# EAGLE board esp-module-ou (EAGLE 9.6.2)
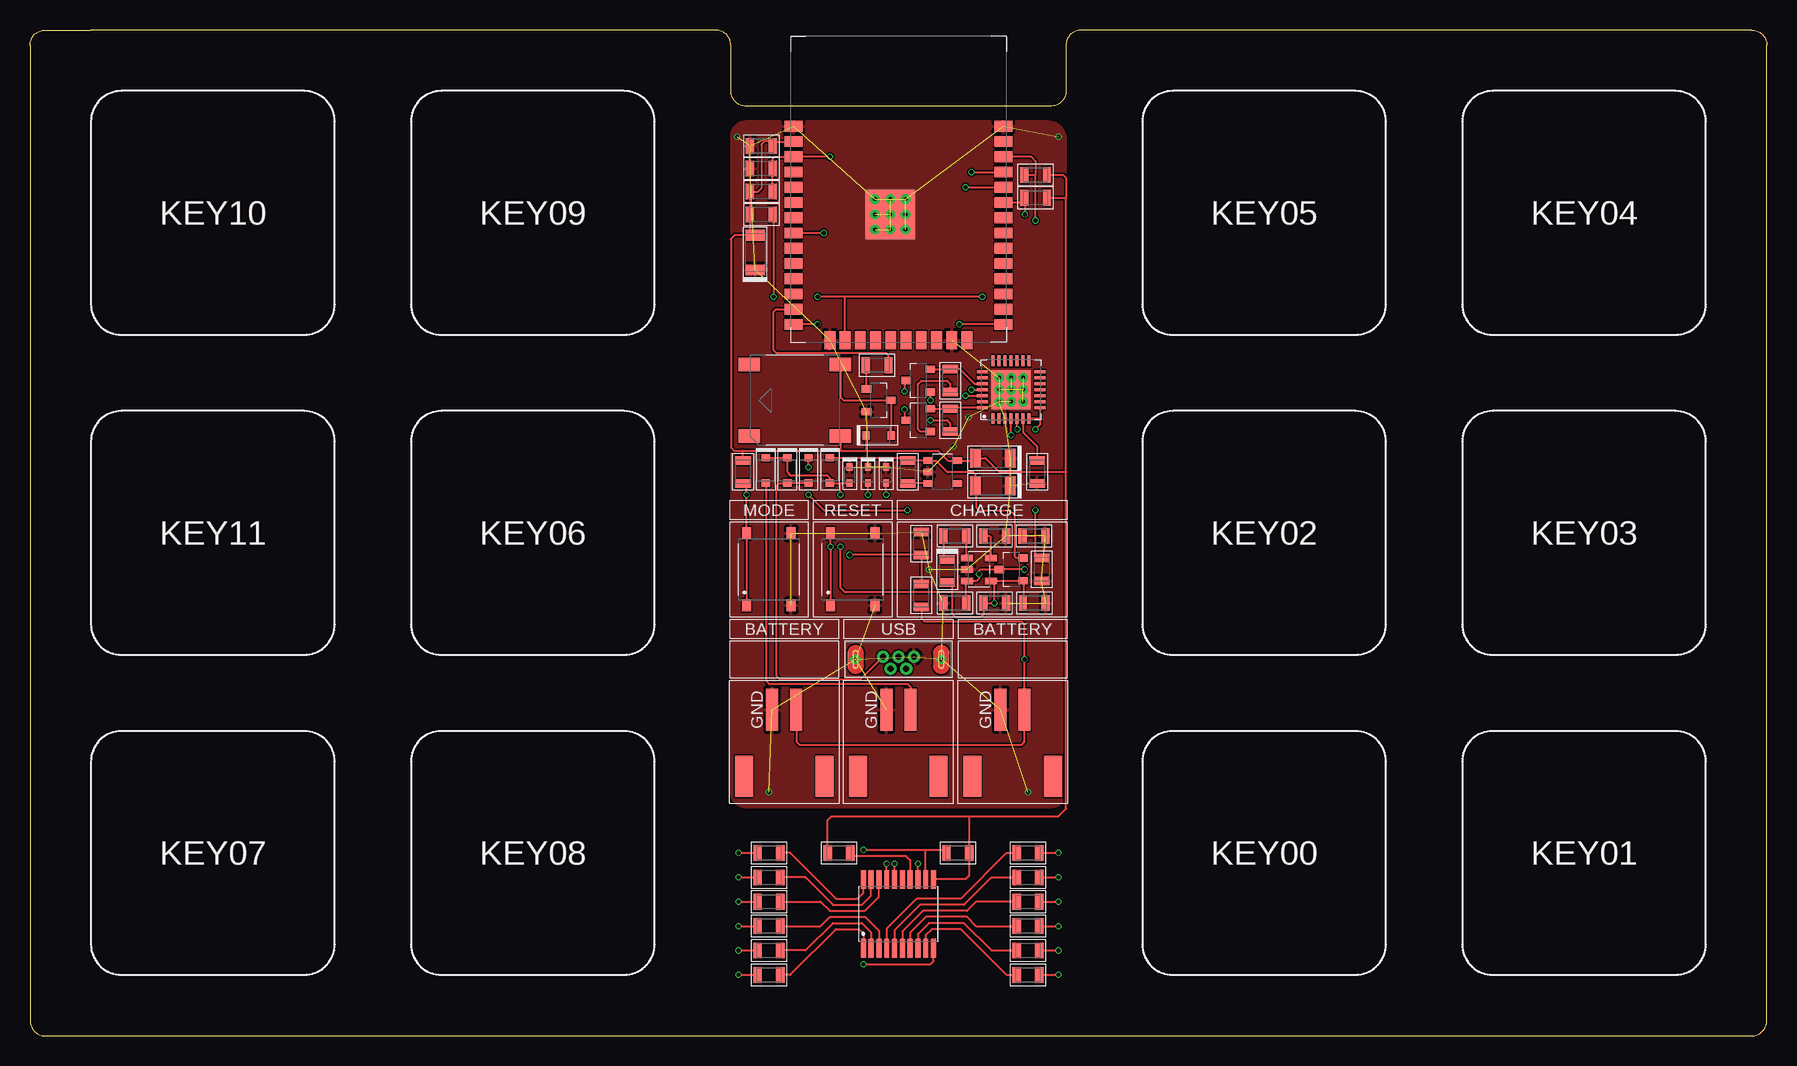
[diagram p0: board, top side]
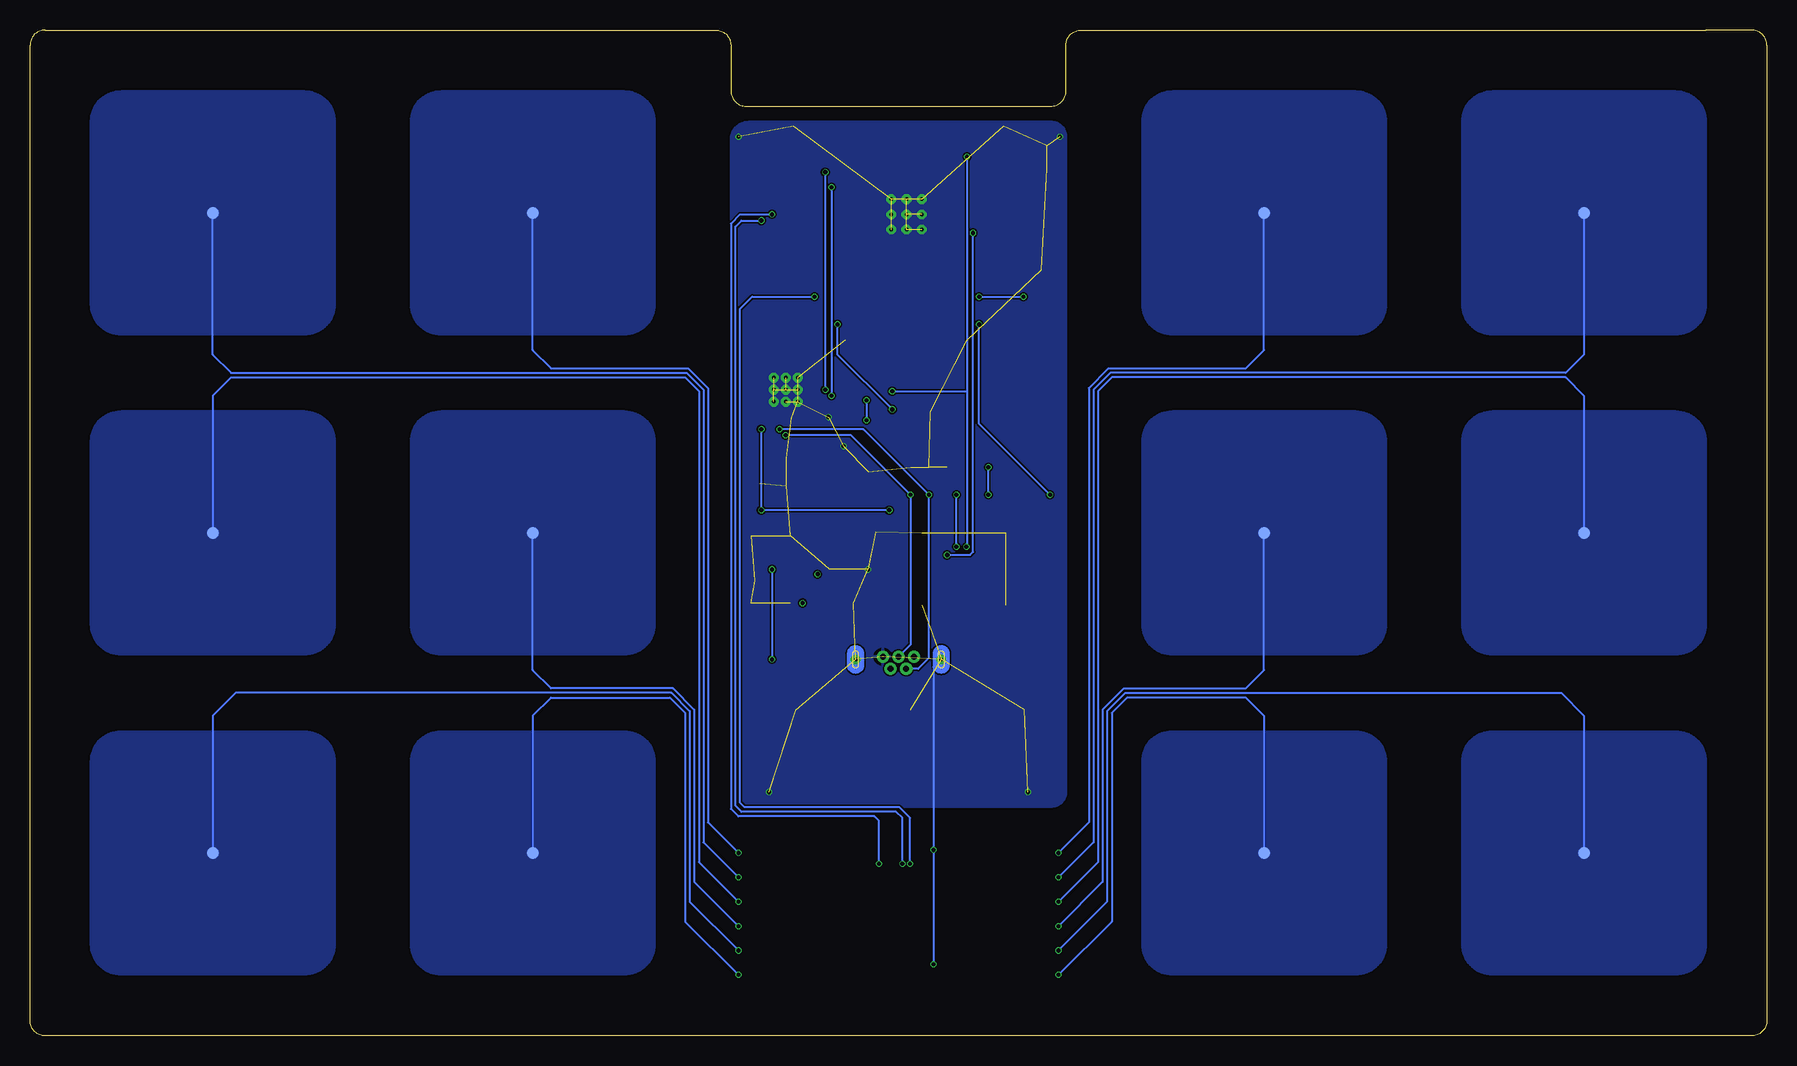
[diagram p1: board, bottom side, seen from below]

Size 144.78 x 83.82 mm. Coordinates in mm from the lower left corner, seen from the top.
Outline: 0,82.55 0,1.27 arc90 1.27,0 143.51,0 arc90 144.78,1.27 144.78,82.55 arc90 143.51,83.82 87.63,83.82 arc90 86.36,82.55 86.36,78.74 arc-90 85.09,77.47 59.69,77.47 arc-90 58.42,78.74 58.42,82.55 arc90 57.15,83.82 5.08,83.82 5.08,83.82 1.27,83.82 arc90 0,82.55
Copper layers (1*16): Top 0.035mm / dielectric 1.6mm / Bottom 0.035mm
Design rules "jlcpcb-2layers": minimum track width 5mil, minimum drill 0.3mm, track to track 5mil, track to pad 5mil, pad to pad 5mil, via to via 5mil, smd to smd 5mil, copper to edge 0.2mm, drill to drill 6mil, minimum pad ring 10mil, minimum via ring 3mil, stop-mask expansion 4mil, vias tented up to drill 0mil, thermal gap 10mil

## Footprints (pad centres in the part's own frame; a part is rotated, then mirrored left to right if it is on the bottom)
I1206-M3216-D = smd 0.9 x 1.6: 1 -1.45,0; 2 1.45,0
I0805-M2012-C = smd 0.7 x 1.3: 1 -0.95,0; 2 0.95,0
SOD-323 = smd 0.6 x 0.7: 1 -1.055,0; 2 1.055,0
SOD-523 = smd 0.6 x 0.5: 1 -0.66,0; 2 0.66,0
USB-A-MICRO-TOP = drill 0.5 pad 0.9: 1 -1.3,0.22; 2 -0.65,-0.78; 3 0,0.22; 4 0.65,-0.78; 5 1.3,0.22 | drill 0.3 pad 0.36: 6 3.57,0; 7 -3.57,0
JST-S2B-PH-SM4-TB = smd 1 x 3.5: 1 -1,0; 2 1,0 | smd 1.5 x 3.4: A -3.35,5.55; B 3.35,5.55
I0805-M2012-D = smd 0.7 x 1.3: 1 -0.95,0; 2 0.95,0
QTOUCH = smd 1 x 1: 1 0,0
SOT-23-3 = smd 0.8 x 0.6: 1 1.01,-0.95; 2 1.01,0.95; 3 -1.01,0
I0805-M2012-R = smd 0.7 x 1.3: 1 -0.95,0; 2 0.95,0
SMD-SW-4 = smd 1 x 0.75: 1 -3,1.85; 2 3,1.85; 3 -3,-1.85; 4 3,-1.85
SOT-25-5 = smd 0.55 x 0.8: 1 0.95,1.2; 2 0,1.2; 3 -0.95,1.2; 4 -0.95,-1.2; 5 0.95,-1.2
QFN-28 = smd 0.9 x 0.25: 1 -2.4,1.5; 2 -2.4,1; 3 -2.4,0.5; 4 -2.4,0; 5 -2.4,-0.5; 6 -2.4,-1; 7 -2.4,-1.5; 15 2.4,-1.5; 16 2.4,-1; 17 2.4,-0.5; 18 2.4,0; 19 2.4,0.5; 20 2.4,1; 21 2.4,1.5 | smd 0.25 x 0.9: 8 -1.5,-2.4; 9 -1,-2.4; 10 -0.5,-2.4; 11 0,-2.4; 12 0.5,-2.4; 13 1,-2.4; 14 1.5,-2.4; 22 1.5,2.4; 23 1,2.4; 24 0.5,2.4; 25 0,2.4; 26 -0.5,2.4; 27 -1,2.4; 28 -1.5,2.4 | smd 3.25 x 3.25: 29 0,0 | drill 0.3 pad 0.5: 30 -1,1; 31 0,1; 32 1,1; 33 -1,0; 34 0,0; 35 1,0; 36 -1,-1; 37 0,-1; 38 1,-1
SOT-23-5 = smd 1 x 0.55: 1 -1,0.95; 2 -1,0; 3 -1,-0.95; 4 1,-0.95; 5 1,0.95
TSSOP-20 = smd 1.572 x 0.407: 1 -2.872,2.925; 2 -2.872,2.275; 3 -2.872,1.625; 4 -2.872,0.975; 5 -2.872,0.325; 6 -2.872,-0.325; 7 -2.872,-0.975; 8 -2.872,-1.625; 9 -2.872,-2.275; 10 -2.872,-2.925; 11 2.872,-2.925; 12 2.872,-2.275; 13 2.872,-1.625; 14 2.872,-0.975; 15 2.872,-0.325; 16 2.872,0.325; 17 2.872,0.975; 18 2.872,1.625; 19 2.872,2.275; 20 2.872,2.925
SMD-BUZZER = smd 1.78 x 1.15: 1 -3.795,2.98; 2 -3.795,-2.98; 3 3.795,-2.98; 4 3.795,2.98
ESP32-WROOM-32 = smd 1.5 x 0.9: 1 -8.75,7.34; 2 -8.75,6.07; 3 -8.75,4.8; 4 -8.75,3.53; 5 -8.75,2.26; 6 -8.75,0.99; 7 -8.75,-0.28; 8 -8.75,-1.55; 9 -8.75,-2.82; 10 -8.75,-4.09; 11 -8.75,-5.36; 12 -8.75,-6.63; 13 -8.75,-7.9; 14 -8.75,-9.17; 25 8.75,-9.17; 26 8.75,-7.9; 27 8.75,-6.63; 28 8.75,-5.36; 29 8.75,-4.09; 30 8.75,-2.82; 31 8.75,-1.55; 32 8.75,-0.28; 33 8.75,0.99; 34 8.75,2.26; 35 8.75,3.53; 36 8.75,4.8; 37 8.75,6.07; 38 8.75,7.34 | smd 0.9 x 1.5: 15 -5.715,-10.47; 16 -4.445,-10.47; 17 -3.175,-10.47; 18 -1.905,-10.47; 19 -0.635,-10.47; 20 0.635,-10.47; 21 1.905,-10.47; 22 3.175,-10.47; 23 4.445,-10.47; 24 5.715,-10.47 | smd 4.1 x 4.1: 39 -0.68,0 | drill 0.3 pad 0.5: 40 0.59,-1.27; 41 -0.68,-1.27; 42 -1.95,-1.27; 43 0.59,0; 44 -0.68,0; 45 -1.95,0; 46 0.59,1.27; 47 -0.68,1.27; 48 -1.95,1.27

## Placement (x,y rotation side)
C1  10uF  [I1206-M3216-D]  80.26,45.85 0 top
C2  10uF  [I1206-M3216-D]  80.26,48.13 0 top
C3  1U  [I0805-M2012-C]  84.33,38.86 90 top
C4  10U  [I0805-M2012-C]  80.42,36.07 0 top
C5  100nF  [I0805-M2012-C]  83.69,41.66 180 top
C6  100nF  [I0805-M2012-C]  83.95,46.99 90 top
C7  10U  [I0805-M2012-C]  77.09,36.07 180 top
C8  100nF  [I0805-M2012-C]  77.34,15.25 180 top
C9  22uF  [I1206-M3216-D]  60.45,65.28 270 top
C10  100nF  [I0805-M2012-C]  60.96,74.17 180 top
C11  100nF  [I0805-M2012-C]  60.96,72.26 180 top
D1  30V  [SOD-323]  64.9,47.12 90 top
D2  5.0V  [SOD-523]  68.33,46.74 90 top
D3  30V  [SOD-323]  61.34,47.12 90 top
D4  30V  [SOD-323]  63.12,47.12 90 top
D5  5.0V  [SOD-523]  71.37,46.74 90 top
D6  30V  [SOD-323]  66.67,47.12 90 top
D7  5.0V  [SOD-523]  69.85,46.74 90 top
D8  30V  [SOD-323]  70.74,50.04 180 top
J1  USB-A-MICRO-TOP  [USB-A-MICRO-TOP]  72.39,31.37 0 top
J2  2P  [JST-S2B-PH-SM4-TB]  62.87,27.18 180 top
J3  2P  [JST-S2B-PH-SM4-TB]  81.92,27.18 180 top
J4  2P  [JST-S2B-PH-SM4-TB]  72.39,27.18 180 top
LED1  RED  [I0805-M2012-D]  76.45,38.73 90 top
P1  2P  [CONNECTOR-DEFAULT]  62.99,21.59 0 top
P2  2P  [CONNECTOR-DEFAULT]  81.92,21.59 0 top
P3  2P  [CONNECTOR-DEFAULT]  72.39,21.59 180 top
PAD1  QTOUCH  [QTOUCH]  102.87,15.24 180 bottom
PAD2  QTOUCH  [QTOUCH]  129.54,15.24 180 bottom
PAD3  QTOUCH  [QTOUCH]  102.87,41.91 180 bottom
PAD4  QTOUCH  [QTOUCH]  129.54,41.91 180 bottom
PAD5  QTOUCH  [QTOUCH]  129.54,68.58 180 bottom
PAD6  QTOUCH  [QTOUCH]  102.87,68.58 180 bottom
PAD7  QTOUCH  [QTOUCH]  41.91,41.91 180 bottom
PAD8  QTOUCH  [QTOUCH]  15.24,15.24 180 bottom
PAD9  QTOUCH  [QTOUCH]  41.91,15.24 180 bottom
PAD10  QTOUCH  [QTOUCH]  41.91,68.58 180 bottom
PAD11  QTOUCH  [QTOUCH]  15.24,68.58 180 bottom
PAD12  QTOUCH  [QTOUCH]  15.24,41.91 180 bottom
Q1  DMG3415U  [SOT-23-3]  81.79,38.86 0 top
R1  100k  [I0805-M2012-R]  73.15,46.99 270 top
R2  100k  [I0805-M2012-R]  83.72,36.07 0 top
R3  220  [I0805-M2012-R]  77.09,41.66 0 top
R4  2k  [I0805-M2012-R]  80.42,41.66 0 top
R5  10k  [I0805-M2012-R]  76.71,51.31 270 top
R6  10k  [I0805-M2012-R]  76.71,54.61 270 top
R7  100k  [I0805-M2012-R]  74.3,36.7 90 top
R8  100k  [I0805-M2012-R]  74.3,41.02 90 top
R9  4.7k  [I0805-M2012-R]  83.82,71.75 180 top
R10  4.7k  [I0805-M2012-R]  83.82,69.84 180 top
R11  10k  [I0805-M2012-R]  83.19,5.08 0 top
R12  10k  [I0805-M2012-R]  83.19,7.11 0 top
R13  10k  [I0805-M2012-R]  83.19,9.14 0 top
R14  10k  [I0805-M2012-R]  83.19,11.18 0 top
R15  10k  [I0805-M2012-R]  83.19,13.21 0 top
R16  10k  [I0805-M2012-R]  83.19,15.24 0 top
R17  47k  [I0805-M2012-R]  60.96,68.46 0 top
R18  47k  [I0805-M2012-R]  67.44,15.23 0 top
R19  10k  [I0805-M2012-R]  61.59,9.14 0 top
R20  10k  [I0805-M2012-R]  61.59,7.11 0 top
R21  10k  [I0805-M2012-R]  61.59,5.08 180 top
R22  10k  [I0805-M2012-R]  61.59,15.24 180 top
R23  10k  [I0805-M2012-R]  61.59,13.21 180 top
R24  10k  [I0805-M2012-R]  61.59,11.18 0 top
R25  220  [I0805-M2012-R]  70.61,55.88 180 top
R26  100k  [I0805-M2012-R]  60.96,70.36 0 top
R27  100k  [I0805-M2012-R]  59.44,46.99 270 top
S1  SPST  [SMD-SW-4]  68.58,38.86 90 top
S2  SPST  [SMD-SW-4]  61.59,38.86 90 top
T1  BC817  [SOT-23-3]  74.04,54.61 0 top
T2  BC817  [SOT-23-3]  74.04,51.31 0 top
T3  BC817  [SOT-23-3]  70.74,52.96 180 top
U1  AP2112  [SOT-25-5]  76.07,46.99 90 top
U2  CP2102  [QFN-28]  81.79,53.85 90 top
U3  MCP73831  [SOT-23-5]  79.12,38.86 0 top
U4  AT42QT2120  [TSSOP-20]  72.39,10.16 90 top
U5  BUZZER  [SMD-BUZZER]  63.75,52.96 180 top
U6  ESP32-WROOM-N8-32  [ESP32-WROOM-32]  72.39,68.45 0 top

## Library data of the parts
C1 C2 = deiring-components; LCSC: C7171; MF: Kyocera AVX; MPN: TAJA106K016RNJ; VOLTAGE: 16V
C3 = deiring-components; LCSC: C215803; MF: FH (Guangdong Fenghua Advanced Tech); MPN: 0805B105K500NT; TOLERANCE: 10%; VOLTAGE: 50V
C4 C7 = deiring-components; LCSC: C15850; MF: Samsung Electro-Mechanics; MPN: CL21A106KAYNNNE; TOLERANCE: 10%; VOLTAGE: 25V
C5 C6 C8 C10 C11 = deiring-components; LCSC: C38141; MF: FH (Guangdong Fenghua Advanced Tech); MPN: 0805B104K500NT; TOLERANCE: 10%; VOLTAGE: 50V
C9 = deiring-components; LCSC: C11366; MF: Kyocera AVX; MPN: TAJA226K010RNJ; VOLTAGE: 10V
D1 D3 D4 D6 D8 = deiring-components; LCSC: C124187; MF: Diodes Incorporated; MPN: BAT760-7
D2 D5 D7 = deiring-components; LCSC: C383211; MF: LRC; MPN: LESD5D5.0CT1G
J1 = deiring-components; LCSC: C437032; MF: XKB Connectivity; MPN: U255-051N-4BH70-FS
J2-J4 = deiring-components; LCSC: C295747; MF: JST Sales America; MPN: S2B-PH-SM4-TB(LF)(SN)
LED1 = deiring-components; LCSC: C84256; MF: Foshan NationStar Optoelectronics; MPN: FC-2012HRK-620D
P1-P3 = deiring-components; LCSC: C3195190; MF: JST Sales America; MPN: PHR-2
PAD1-PAD12 = deiring-components
Q1 = deiring-components; CURRENT: 4A; LCSC: C96616; MF: Diodes Incorporated; MPN: DMG3415U-7; VOLTAGE: 20V
R1 R2 R7 R8 R26 R27 = deiring-components; LCSC: C149504; MF: UNI-ROYAL(Uniroyal Elec); MPN: 0805W8F1003T5E; WATTAGE: 1/8W
R3 R25 = deiring-components; LCSC: C17557; MF: UNI-ROYAL(Uniroyal Elec); MPN: 0805W8F2200T5E; WATTAGE: 1/8W
R4 = deiring-components; LCSC: C17604; MF: UNI-ROYAL(Uniroyal Elec); MPN: 0805W8F2001T5E; WATTAGE: 1/8W
R5 R6 R11-R16 R19-R24 = deiring-components; LCSC: C17414; MF: UNI-ROYAL(Uniroyal Elec); MPN: 0805W8F1002T5E; WATTAGE: 1/8W
R9 R10 = deiring-components; LCSC: C17673; MF: UNI-ROYAL(Uniroyal Elec); MPN: 0805W8F4701T5E; WATTAGE: 1/8W
R17 R18 = deiring-components; LCSC: C17713; MF: UNI-ROYAL(Uniroyal Elec); MPN: 0805W8F4702T5E; WATTAGE: 1/8W
S1 S2 = deiring-components; LCSC: C318884; MF: XKB Enterprise; MPN: TS-1187A-B-A-B; VOLTAGE: 12V
T1-T3 = deiring-components; LCSC: C52801; MF: Nexperia; MPN: BC817-40,215
U1 = deiring-components; LCSC: C3021085; MF: TECH PUBLIC; MPN: TPAP2112K-3.3TRG1
U2 = deiring-components; LCSC: C6568; MF: SILICON LABS; MPN: CP2102-GMR
U3 = deiring-components; LCSC: C14879; MF: Microchip Tech; MPN: MCP73831T-2ATI/OT
U4 = deiring-components; LCSC: C1522278; MF: Microchip Tech; MPN: AT42QT2120-XU
U5 = deiring-components; LCSC: C95299; MF: MLT-7525; MPN: Jiangsu Huaneng Elec
U6 = deiring-components; LCSC: C529582; MF: Espressif Systems; MPN: ESP32-WROOM-32-N8; VALUES: ESP32

## Nets
!CHANGE: R17.2 U4.17 U6.16
!RESET: R18.2 U4.14
APEN: R1.2 U1.3
BAT: R7.2 R8.1 U6.8
BUZ: R25.1 U6.13
BZB: R25.2 T3.1
BZC: D8.1 T3.3 U5.2
D+: D5.1 J1.3 U2.4
D-: D7.1 J1.2 U2.5
DTR: R5.1 T2.2 U2.28
DTRT: R5.2 T1.1
EN: C11.1 R26.2 S1.1 S1.2 T1.3 U6.3
GND: C1.2 C2.2 C3.1 C4.2 C5.1 C6.1 C7.2 C8.2 C9.2 C10.2 C11.2 D2.2 D5.2 D7.2 J1.5 J1.6 J1.7 J2.2 J3.2 J4.2 R2.2 R4.2 R8.2 S1.3 S1.4 S2.3 S2.4 T3.2 U1.2 U2.3 U2.29 U2.30 U2.31 U2.32 U2.33 U2.34 U2.35 U2.36 U2.37 U2.38 U3.2 U4.10 U4.12 U6.1 U6.15 U6.23 U6.38 U6.39 U6.40 U6.41 U6.42 U6.43 U6.44 U6.45 U6.46 U6.47 U6.48
IO00: T2.3 U6.25
KEY0: R11.1 U4.9
KEY1: R12.1 U4.8
KEY2: R13.1 U4.7
KEY3: R14.1 U4.6
KEY4: R15.1 U4.5
KEY5: R16.1 U4.4
KEY6: R19.2 U4.3
KEY7: R20.2 U4.2
KEY8: R21.1 U4.1
KEY9: R22.1 U4.20
KEY10: R23.1 U4.19
KEY11: R24.2 U4.18
MODE: R27.2 S2.1 S2.2 U6.14
PAD00: PAD1.1 R11.2
PAD01: PAD2.1 R12.2
PAD02: PAD3.1 R13.2
PAD03: PAD4.1 R14.2
PAD04: PAD5.1 R15.2
PAD05: PAD6.1 R16.2
PAD06: PAD7.1 R19.1
PAD07: PAD8.1 R20.1
PAD08: PAD9.1 R21.2
PAD09: PAD10.1 R22.2
PAD10: PAD11.1 R23.2
PAD11: PAD12.1 R24.1
PROG: R4.1 U3.5
RTS: R6.1 T1.2 U2.24
RTST: R6.2 T2.1
RXD0: U2.26 U6.34
SCL: R9.2 U4.16 U6.36
SDA: R10.2 U4.13 U6.33
STAT: R3.2 U3.1
STATLED: LED1.2 R3.1
TXD0: U2.25 U6.35
VBAT: C7.1 J2.1 J3.1 Q1.3 R7.1 U3.3
VBUS: C3.2 C5.2 D1.2 U2.7 U2.8
VCC3: C2.1 C8.1 C9.1 C10.1 D8.2 R9.1 R10.1 R17.1 R18.1 R26.1 R27.1 U1.5 U4.11 U5.1 U6.2
VCC5: C4.1 D2.1 D3.2 D4.2 D6.1 LED1.1 Q1.1 R2.1 U3.4
VDD: C6.2 U2.6
VEXT: D3.1 J4.1
VIN: C1.1 D6.2 Q1.2 R1.1 U1.1
VUSB: D1.1 D4.1 J1.1

## Tracks (layer width: path | path; a pad name or v marks a point on that pad's centre or on a via)
!CHANGE  (via drill 0.35)
  Top 0.152: U4.17 v71.42,14.35 | v79.38,61.59 67.94,61.59 | 67.94,61.59 v65.66,61.59 | R17.2 61.98,68.46 v61.98,61.59 | U6.16 67.94,61.59
  Bottom 0.152: v71.42,14.35 71.42,18.16 72.3,19.05 85.22,19.05 85.6,19.43 85.6,60.58 84.58,61.59 v79.38,61.59 | v65.66,61.59 v61.98,61.59
!RESET
  Top 0.152: R18.2 68.39,14.98 73.03,14.98 73.36,14.65 U4.14
APEN
  Top 0.152: U1.3 R1.2
BAT  (via drill 0.35)
  Top 0.152: R7.2 R8.1 v68.33,40.07 | v66.17,66.9 U6.8
  Bottom 0.152: v68.33,40.07 66.42,40.07 66.17,40.33 v66.17,66.9
BUZ
  Top 0.152: 71.56,56.01 R25.1 71.56,56.71 71.37,56.9 62.23,56.9 61.98,57.15 61.98,60.33 62.2,60.55 U6.13
BZB
  Top 0.152: T3.1 69.73,55.88 R25.2
BZC
  Top 0.152: U5.2 67.55,53.23 67.82,52.96 T3.3 71.79,52.96 D8.1
D+  (via drill 0.35)
  Top 0.152: v71.37,45.09 D5.1 | v81.79,50.04 U2.4
  Bottom 0.152: v81.79,50.04 76.33,50.04 v71.37,45.09 71.37,32.6 J1.3
D-  (via drill 0.35)
  Top 0.152: v69.85,45.09 D7.1 | v82.3,50.55 82.29,50.55 U2.5
  Bottom 0.152: v82.3,50.55 75.31,50.55 v69.85,45.09 69.85,31.5 70.76,30.59 J1.2
DTR
  Top 0.152: T2.2 R5.1 76.8,52.35 U2.28
DTRT  (via drill 0.35)
  Top 0.152: v75.06,52.96 T1.1 | v75.06,51.31 76.45,51.31 76.71,51.05 R5.2
  Bottom 0.152: v75.06,52.96 v75.06,51.31
EN  (via drill 0.35)
  Top 0.152: T1.3 72.9,54.61 v72.9,53.72 | R26.2 C11.1 61.91,73.09 62.08,73.25 U6.3 v66.67,73.25 | S1.2 v66.73,40.77 S1.1
  Bottom 0.152: v66.67,73.25 66.67,53.72 | 66.67,53.72 66.67,40.82 v66.73,40.77 | v72.9,53.72 66.67,53.72
GND  (via drill 0.35)  (58 unrouted)
  Top 0.152: U4.10 75.31,6.23 75.06,5.97 v69.47,5.97 | v69.47,15.49 74.67,15.49 | U4.12 74.67,15.49 | 74.67,15.49 76.39,15.49 C8.2
  Bottom 0.152: v69.47,5.97 v69.47,15.49 69.47,30.72 J1.7
  other vias: 74.93,38.86 78.23,51.56 58.93,74.93 85.72,74.93 61.59,20.32 83.19,20.32 76.96,49.15
  pour Top: 59.69,19.05 85.09,19.05 arc90 86.36,20.32 86.36,74.68 arc90 84.84,76.2 59.69,76.2 arc90 58.42,74.93 58.42,20.32 arc90
  pour Bottom: 59.69,19.05 85.09,19.05 arc90 86.36,20.32 86.36,74.68 arc90 84.84,76.2 59.69,76.2 arc90 58.42,74.93 58.42,20.32 arc90
IO00  (via drill 0.35)
  Top 0.152: T2.3 72.9,51.31 v72.9,52.2 | U6.25 v77.47,59.28
  Bottom 0.152: v72.9,52.2 77.47,56.76 v77.47,59.28
KEY0
  Top 0.152: R11.1 81.41,5.08 77.6,8.89 75.18,8.89 74.67,8.37 U4.9
KEY1
  Top 0.152: R12.1 80.14,7.11 77.85,9.4 74.93,9.4 74.02,8.48 U4.8
KEY2
  Top 0.152: R13.1 78.87,9.14 78.11,9.91 74.68,9.91 73.36,8.6 U4.7
KEY3
  Top 0.152: R14.1 78.87,11.18 78.11,10.41 74.42,10.41 72.72,8.71 U4.6
KEY4
  Top 0.152: R15.1 80.14,13.21 77.85,10.92 74.17,10.92 72.06,8.82 U4.5
KEY5
  Top 0.152: R16.1 81.41,15.24 77.6,11.43 73.91,11.43 71.42,8.93 U4.4
KEY6
  Top 0.152: U4.3 70.77,8.74 69.6,9.91 66.67,9.91 65.91,9.14 R19.2
KEY7
  Top 0.152: R20.2 64.64,7.11 66.93,9.4 69.34,9.4 70.11,8.62 U4.2
KEY8
  Top 0.152: R21.1 63.37,5.08 67.18,8.89 69.09,8.89 69.47,8.51 U4.1
KEY9
  Top 0.152: R22.1 63.37,15.24 67.18,11.43 68.96,11.43 69.47,11.93 U4.20
KEY10
  Top 0.152: R23.1 64.64,13.21 66.93,10.92 69.34,10.92 70.11,11.7 U4.19
KEY11
  Top 0.152: R24.2 65.91,11.18 66.67,10.41 69.6,10.41 70.77,11.58 U4.18
MODE  (via drill 0.35)
  Top 0.152: S2.1 S2.2 v59.74,45.09 59.74,46.04 R27.2 | v65.66,59.28 U6.14
  Bottom 0.152: v59.74,45.09 65.66,51 v65.66,59.28
PAD00  (via drill 0.35)
  Top 0.152: R11.2 v85.72,5.08
  Bottom 0.152: PAD1.1 102.87,26.67 101.35,28.19 91.44,28.19 90.17,26.92 90.17,9.53 v85.72,5.08
  pour Bottom: 92.71,22.86 92.71,7.62 arc90 95.25,5.08 110.49,5.08 arc90 113.03,7.62 113.03,22.86 arc90 110.49,25.4 95.25,25.4 arc90
PAD01  (via drill 0.35)
  Top 0.152: R12.2 v85.72,7.11
  Bottom 0.152: PAD2.1 129.54,26.67 127.64,28.57 91.31,28.57 89.79,27.05 89.79,11.18 v85.72,7.11
  pour Bottom: 139.7,7.62 139.7,22.86 arc90 137.16,25.4 121.92,25.4 arc90 119.38,22.86 119.38,7.62 arc90 121.92,5.08 137.16,5.08 arc90
PAD02  (via drill 0.35)
  Top 0.152: R13.2 v85.72,9.14
  Bottom 0.152: PAD3.1 102.87,30.48 101.35,28.96 91.19,28.96 89.41,27.18 89.41,12.83 v85.72,9.14
  pour Bottom: 110.49,52.07 95.25,52.07 arc90 92.71,49.53 92.71,34.29 arc90 95.25,31.75 110.49,31.75 arc90 113.03,34.29 113.03,49.53 arc90
PAD03  (via drill 0.35)
  Top 0.152: R14.2 v85.72,11.18
  Bottom 0.152: PAD4.1 129.54,53.34 128.02,54.86 90.17,54.86 89.03,53.72 89.03,14.48 v85.72,11.18
  pour Bottom: 137.16,52.07 121.92,52.07 arc90 119.38,49.53 119.38,34.29 arc90 121.92,31.75 137.16,31.75 arc90 139.7,34.29 139.7,49.53 arc90
PAD04  (via drill 0.35)
  Top 0.152: R15.2 v85.72,13.21
  Bottom 0.152: PAD5.1 129.54,56.77 128.02,55.24 90.04,55.24 88.65,53.85 88.65,16.13 v85.72,13.21
  pour Bottom: 137.16,78.74 121.92,78.74 arc90 119.38,76.2 119.38,60.96 arc90 121.92,58.42 137.16,58.42 arc90 139.7,60.96 139.7,76.2 arc90
PAD05  (via drill 0.35)
  Top 0.152: R16.2 v85.72,15.24
  Bottom 0.152: PAD6.1 102.87,57.15 101.35,55.63 89.92,55.63 88.27,53.98 88.27,17.78 v85.72,15.24
  pour Bottom: 110.49,78.74 95.25,78.74 arc90 92.71,76.2 92.71,60.96 arc90 95.25,58.42 110.49,58.42 arc90 113.03,60.96 113.03,76.2 arc90
PAD06  (via drill 0.35)
  Top 0.152: v59.05,9.14 R19.1
  Bottom 0.152: PAD7.1 41.91,30.48 43.43,28.96 53.59,28.96 55.37,27.18 55.37,12.83 v59.05,9.14
  pour Bottom: 31.75,49.53 31.75,34.29 arc90 34.29,31.75 49.53,31.75 arc90 52.07,34.29 52.07,49.53 arc90 49.53,52.07 34.29,52.07 arc90
PAD07  (via drill 0.35)
  Top 0.152: v59.05,7.11 R20.1
  Bottom 0.152: PAD8.1 15.24,26.67 17.14,28.57 53.47,28.57 54.99,27.05 54.99,11.18 v59.05,7.11
  pour Bottom: 22.86,25.4 7.62,25.4 arc90 5.08,22.86 5.08,7.62 arc90 7.62,5.08 22.86,5.08 arc90 25.4,7.62 25.4,22.86 arc90
PAD08  (via drill 0.35)
  Top 0.152: v59.05,5.08 R21.2
  Bottom 0.152: PAD9.1 41.91,26.67 43.43,28.19 53.34,28.19 54.61,26.92 54.61,9.53 v59.05,5.08
  pour Bottom: 52.07,7.62 52.07,22.86 arc90 49.53,25.4 34.29,25.4 arc90 31.75,22.86 31.75,7.62 arc90 34.29,5.08 49.53,5.08 arc90
PAD09  (via drill 0.35)
  Top 0.152: v59.05,15.24 R22.2
  Bottom 0.152: PAD10.1 41.91,57.15 43.43,55.63 54.86,55.63 56.52,53.98 56.52,17.78 v59.05,15.24
  pour Bottom: 31.75,76.2 31.75,60.96 arc90 34.29,58.42 49.53,58.42 arc90 52.07,60.96 52.07,76.2 arc90 49.53,78.74 34.29,78.74 arc90
PAD10  (via drill 0.35)
  Top 0.152: v59.05,13.21 R23.2
  Bottom 0.152: PAD11.1 15.24,56.77 16.76,55.24 54.74,55.24 56.13,53.85 56.13,16.13 v59.05,13.21
  pour Bottom: 22.86,78.74 7.62,78.74 arc90 5.08,76.2 5.08,60.96 arc90 7.62,58.42 22.86,58.42 arc90 25.4,60.96 25.4,76.2 arc90
PAD11  (via drill 0.35)
  Top 0.152: v59.05,11.18 R24.1
  Bottom 0.152: PAD12.1 15.24,53.34 16.76,54.86 54.61,54.86 55.75,53.72 55.75,14.48 v59.05,11.18
  pour Bottom: 25.4,34.29 25.4,49.53 arc90 22.86,52.07 7.62,52.07 arc90 5.08,49.53 5.08,34.29 arc90 7.62,31.75 22.86,31.75 arc90
PROG
  Top 0.152: U3.5 80.12,41.53 79.99,41.66 R4.1
RTS
  Top 0.152: U2.24 78.75,54.35 77.54,55.56 R6.1 T1.2
RTST
  Top 0.152: T2.1 74.23,50.36 74.04,50.55 74.04,54.36 74.3,54.61 76.45,54.61 76.71,54.36 R6.2
RXD0  (via drill 0.35)
  Top 0.152: v77.98,53.34 U2.26 | v77.98,70.71 U6.34
  Bottom 0.152: v77.98,70.71 v77.98,53.34
SCL  (via drill 0.35)
  Top 0.152: U4.16 v72.06,14.35 | U6.36 83.47,73.25 83.82,72.9 83.82,71.75 | v83.82,67.94 83.82,71.75 | R9.2 83.82,71.75
  Bottom 0.152: v72.06,14.35 72.06,18.16 72.57,18.67 85.47,18.67 85.98,19.18 85.98,67.44 85.47,67.94 v83.82,67.94
SDA  (via drill 0.35)
  Top 0.152: U4.13 v74.02,14.35 | U6.33 82.87,69.44 R10.2 82.93,69.78 v82.93,68.45
  Bottom 0.152: v74.02,14.35 74.02,17.91 74.4,18.29 85.72,18.29 86.36,18.92 86.36,67.69 85.6,68.45 v82.93,68.45
STAT
  Top 0.152: R3.2 78.04,39.81 U3.1
STATLED
  Top 0.152: R3.1 76.14,39.69 LED1.2
TXD0  (via drill 0.35)
  Top 0.152: v78.49,53.85 U2.25 | v78.49,71.98 U6.35
  Bottom 0.152: v78.49,53.85 v78.49,71.98
VBAT  (via drill 0.35)
  Top 0.152: R7.1 74.3,34.8 74.55,34.54 82.66,34.54 82.92,34.29 v82.92,31.37 J3.1 82.92,24.5 82.68,24.26 64.14,24.26 63.88,24.51 63.88,27.18 J2.1 | C7.1 78.04,37.91 U3.3 78.93,37.91 79.12,38.1 v79.12,38.48 79.12,38.73 79.25,38.86 Q1.3 v82.92,38.86
  Bottom 0.152: v82.92,38.86 v82.92,31.37
VBUS  (via drill 0.35)
  Top 0.152: U2.8 84.2,52.34 84.2,51.45 | U2.7 84.2,51.45 | 84.2,51.45 84.2,50.93 v83.82,50.55 | C5.2 83.82,41.66 | C3.2 83.82,39.81 83.82,41.66 | 83.82,41.66 v83.82,43.81 | v64.9,45.09 66.17,43.81 v73.15,43.81 | v64.9,47.37 D1.2
  Bottom 0.152: v83.82,50.55 v83.82,43.81 v73.15,43.81 | v64.9,45.09 v64.9,47.37
VCC3
  Top 0.152: 86.36,46.99 86.36,18.92 85.72,18.29 78.29,18.29 | R27.1 59.44,48.77 | 59.44,48.77 58.67,48.77 58.42,49.02 58.42,66.42 58.73,66.73 C9.1 60.01,66.73 R17.1 R26.1 60.71,70.36 60.96,70.61 60.96,74.3 61.21,74.55 61.91,74.55 C10.1 61.91,74.52 U6.2 | R10.1 86.36,69.84 | R9.1 86.11,71.75 86.36,71.5 86.36,69.84 | 59.44,48.77 67.55,48.77 | 86.36,46.99 80.77,46.99 79.63,48.13 C2.1 78.81,47.94 U1.5 76.52,47.94 75.69,48.77 69.68,48.77 | 67.55,48.77 69.68,48.77 | 86.36,46.99 86.36,69.84 | D8.2 69.68,48.77 | U5.1 67.55,48.77 | R18.1 66.49,17.97 66.8,18.29 78.29,18.29 | U4.11 75.36,13.08 77.98,13.08 78.29,13.4 C8.1 78.29,18.29
VCC5  (via drill 0.35)
  Top 0.152: R2.1 82.8,36.07 Q1.1 U3.4 80.39,37.91 v80.39,36.07 C4.1 79.5,36.07 79.5,35.18 79.25,34.92 77.09,34.92 76.83,35.18 76.83,36.96 | LED1.1 76.83,37.78 76.83,36.96 | 76.83,36.96 67.94,36.96 67.56,37.34 v67.56,40.77 | 67.56,46.06 D6.1 66.67,46.48 66.42,46.74 63.37,46.74 63.12,46.99 D4.2 D3.2 | v67.56,45.09 67.56,46.06 | 67.56,46.06 68.31,46.06 D2.1
  Bottom 0.152: v67.56,40.77 v67.56,45.09
VDD
  Top 0.152: U2.6 82.79,50.31 83.95,49.15 C6.2
VEXT
  Top 0.152: D3.1 61.34,29.59 61.59,29.34 73.15,29.34 73.39,29.1 J4.1
VIN
  Top 0.152: D6.2 73.15,48.17 R1.1 U1.1 75.5,47.94 76.48,46.96 78.64,46.96 78.81,46.79 C1.1 78.87,45.79 78.87,44.07 79.12,43.81 81.66,43.81 82.04,43.43 82.04,40.01 82.23,39.81 Q1.2
VUSB
  Top 0.152: J1.1 69.19,29.68 62.52,29.68 62.23,29.97 62.23,45.85 62.45,46.06 D4.1 D1.1

## Text on the board
tNames: KEY10 | KEY09 | KEY05 | KEY04 | MODE | RESET | CHARGE | KEY11 | KEY06 | KEY02 | KEY03 | BATTERY | USB | BATTERY | GND | GND | GND | KEY07 | KEY08 | KEY00 | KEY01